# Altium PCB Core.PcbDoc
Units mm, origin at the board's own origin, x right, y up, seen from the top; angles counter-clockwise.
Board outline 86 x 54 mm, 2 copper layers (Top Layer, Bottom Layer); 15 components, 43 nets, 120 pads, 4 vias.
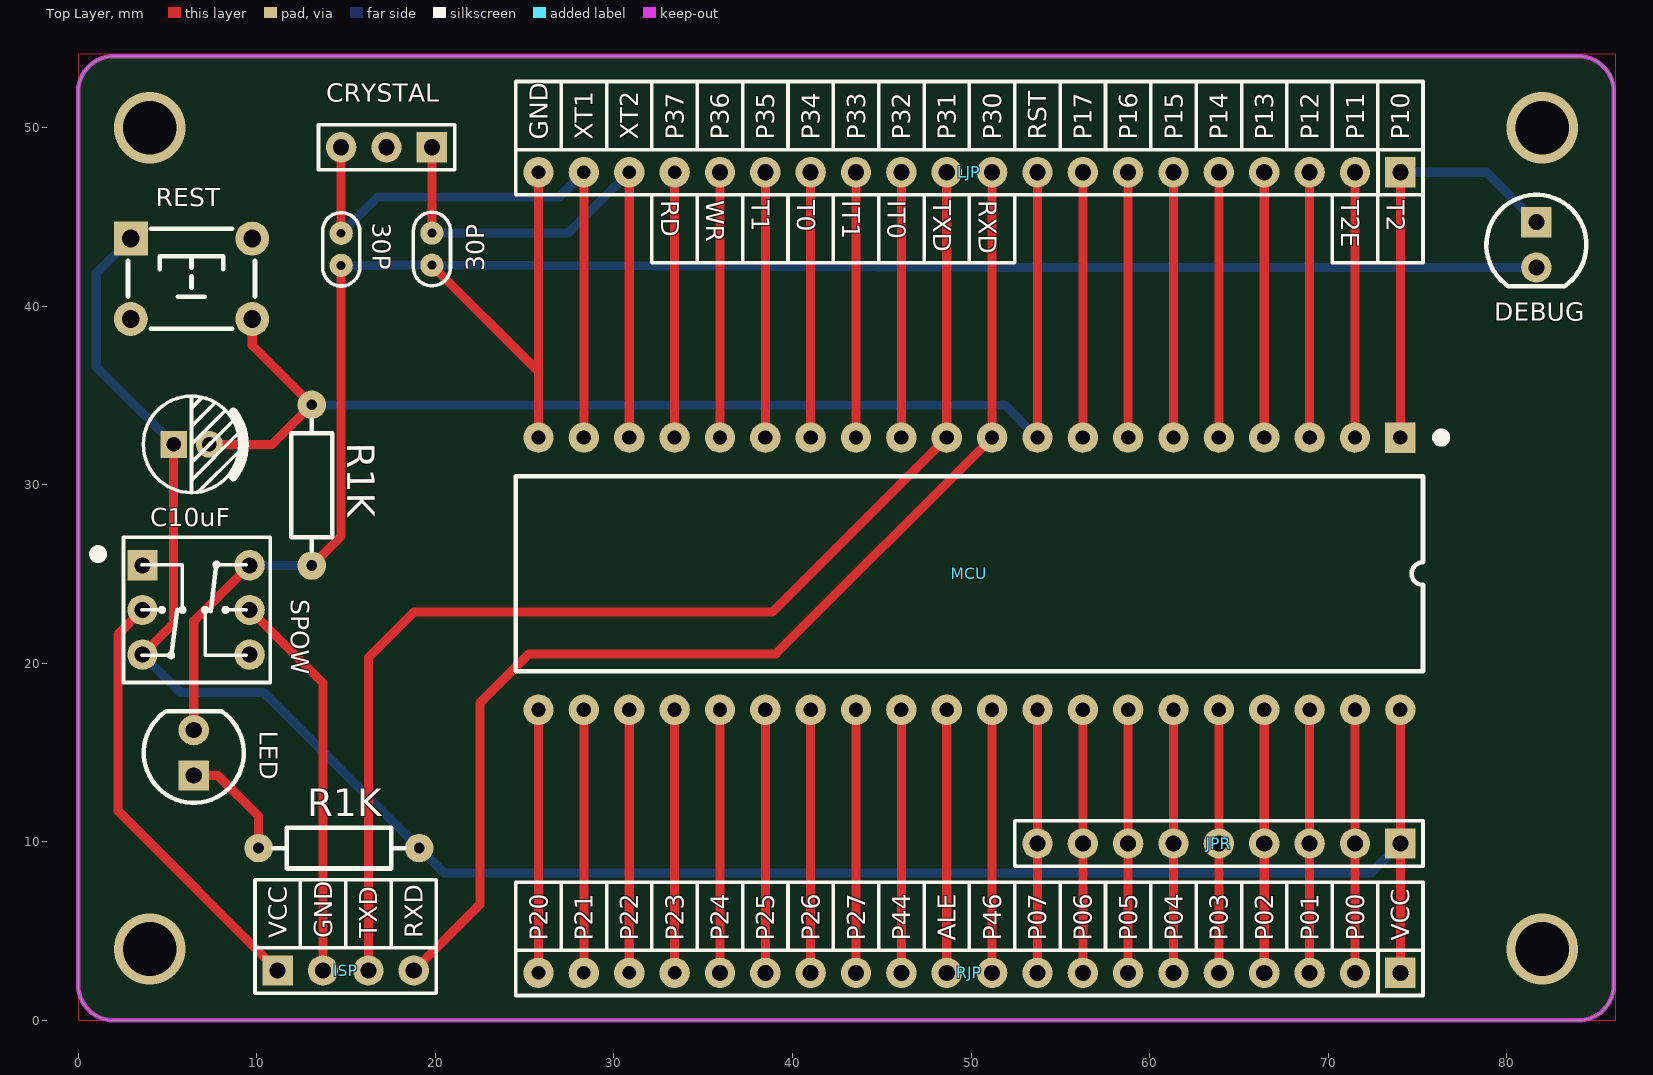
[diagram p0: Top Layer view]
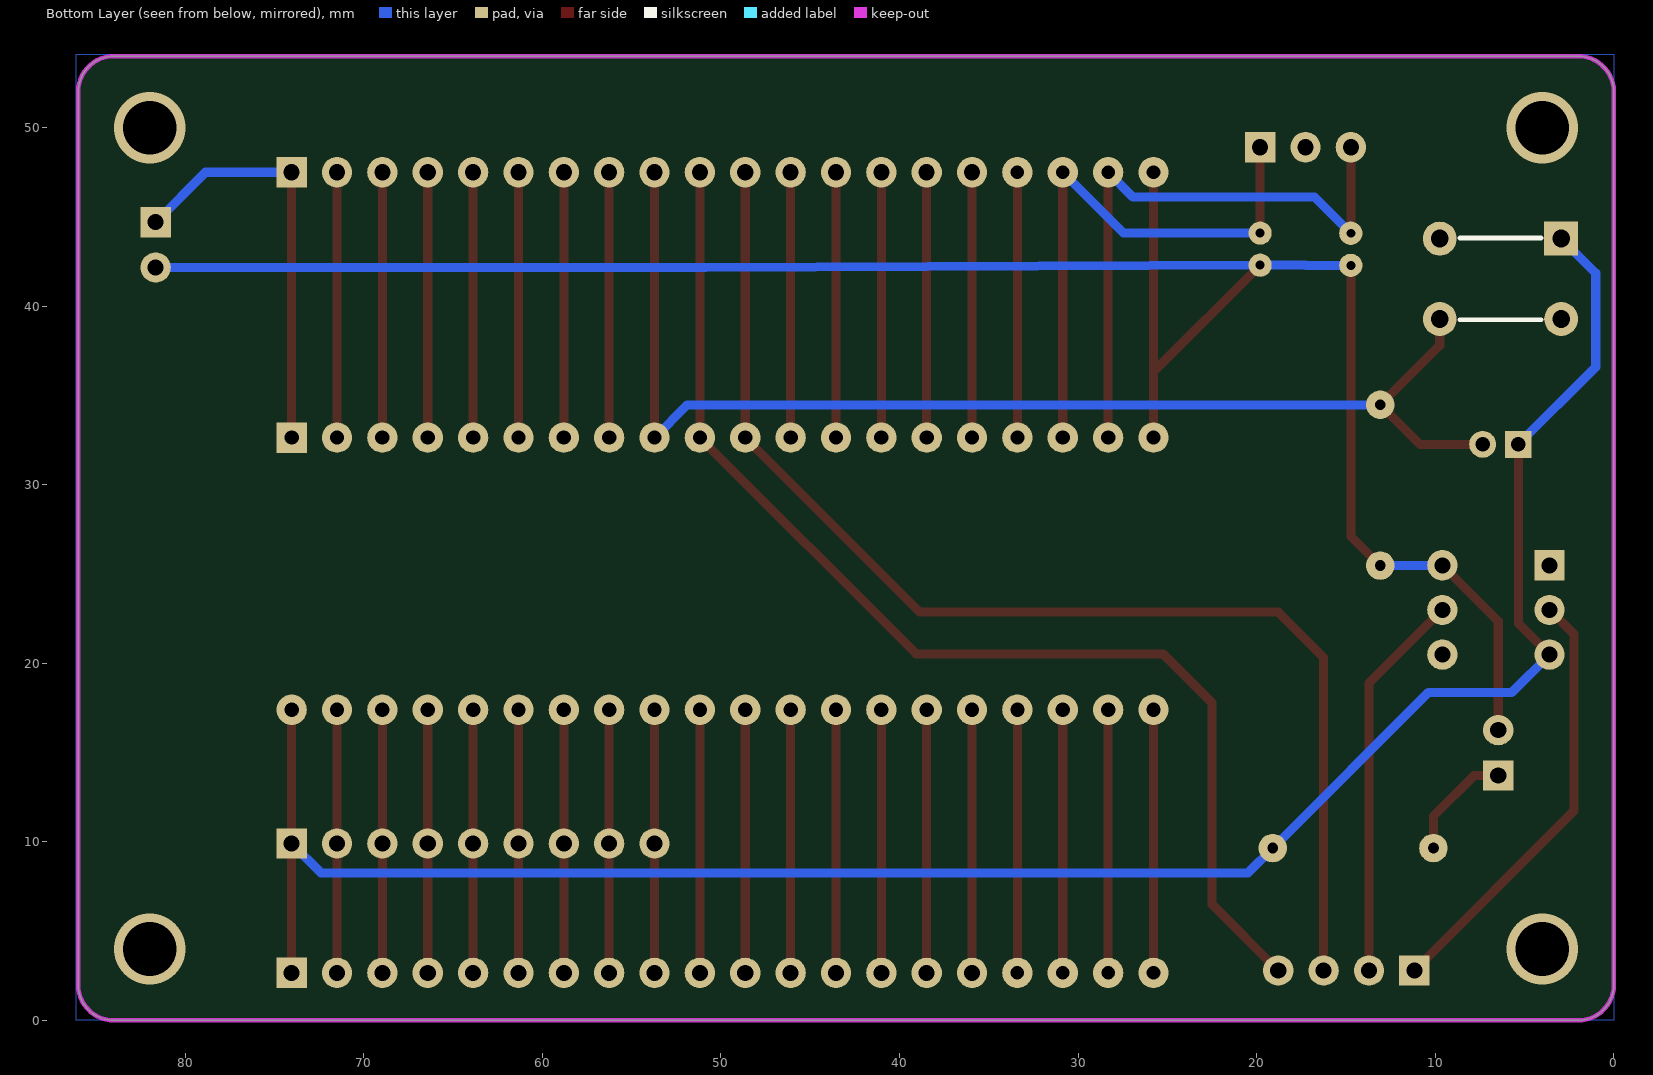
[diagram p1: Bottom Layer view, seen from below]

## Layer stack, top to bottom
Top Solder: solder mask 0.0102, Solder Resist, Dk 3.5
Top Layer: signal copper 0.0356
Dielectric 1: dielectric 0.32, FR-4, Dk 4.8
Bottom Layer: signal copper 0.0356
Bottom Solder: solder mask 0.0102, Solder Resist, Dk 3.5

## Board outline
2,0 cw(c2,2) 0,2 0,52 cw(c2,52) 2,54 84,54 cw(c84,52) 86,52 86,2 cw(c84,2) 84,0

## Design rules (kind name [scope] priority, off if disabled: settings)
AssemblyTestPointUsage [All] p0: scope1count=1 scope1_0_kind=Board scope1_0_value=Board scope2count=1 scope2_0_kind=Board scope2_0_value=Board commentlength=0
AssemblyTestpoint [All] p0: scope1count=1 scope1_0_kind=Board scope1_0_value=Board scope2count=1 scope2_0_kind=Board scope2_0_value=Board commentlength=0
Clearance [All] p0: scope1count=1 scope1_0_kind=Board scope1_0_value=Board scope2count=1 scope2_0_kind=Board scope2_0_value=Board commentlength=0 gap=0.254
Clearance [All] p1: gap=0.254 ignorepadtopadclearanceinfootprint=FALSE except(0: Arc-Hole Track-Hole SMDPad-Hole THPad-Hole Via-Hole Fill-Hole Poly-Hole Region-Hole Text-Hole)
ComponentClearance [All] p0: scope1count=1 scope1_0_kind=Board scope1_0_value=Board scope2count=1 scope2_0_kind=Board scope2_0_value=Board commentlength=0 gap=0.254 collisioncheckmode=3
DiffPairsRouting [All] p0: scope1count=1 scope1_0_kind=Board scope1_0_value=Board scope2count=1 scope2_0_kind=Board scope2_0_value=Board commentlength=0
FabricationTestPointUsage [All] p0: scope1count=1 scope1_0_kind=Board scope1_0_value=Board scope2count=1 scope2_0_kind=Board scope2_0_value=Board commentlength=0 valid=0 allowmultiple=FALSE
FabricationTestpoint [All] p0: scope1count=1 scope1_0_kind=Board scope1_0_value=Board scope2count=1 scope2_0_kind=Board scope2_0_value=Board commentlength=0 side=3 testpointundercomponent=TRUE minsize=1.016 maxsize=2.54 preferedsize=1.524 minholesize=0 maxholesize=1.016 preferedholesize=0.813 testpointgrid=0.025
FanoutControl Fanout_BGA [All] p0 off: scope1count=1 scope1_0_kind=Board scope1_0_value=Board scope2count=1 scope2_0_kind=Board scope2_0_value=Board commentlength=69 // Protel DXP Scope 1 Expression Was: IsBGA   Fanout_BGA (Default Rule)
FanoutControl Fanout_LCC [All] p0 off: scope1count=1 scope1_0_kind=Board scope1_0_value=Board scope2count=1 scope2_0_kind=Board scope2_0_value=Board commentlength=69 // Protel DXP Scope 1 Expression Was: IsLCC   Fanout_LCC (Default Rule)
FanoutControl Fanout_SOIC [All] p0 off: scope1count=1 scope1_0_kind=Board scope1_0_value=Board scope2count=1 scope2_0_kind=Board scope2_0_value=Board commentlength=71 // Protel DXP Scope 1 Expression Was: IsSOIC   Fanout_SOIC (Default Rule)
FanoutControl Fanout_Small [All] p0 off: scope1count=1 scope1_0_kind=Board scope1_0_value=Board scope2count=1 scope2_0_kind=Board scope2_0_value=Board commentlength=84 // Protel DXP Scope 1 Expression Was: (CompPinCount < 5)   Fanout_Small (Default Rule)
FanoutControl Fanout_Default [All] p0: scope1count=1 scope1_0_kind=Board scope1_0_value=Board scope2count=1 scope2_0_kind=Board scope2_0_value=Board commentlength=30 // Fanout_Default (Default Rule)
Height [All] p0: scope1count=1 scope1_0_kind=Board scope1_0_value=Board scope2count=1 scope2_0_kind=Board scope2_0_value=Board commentlength=0
HoleSize [All] p0: scope1count=1 scope1_0_kind=Board scope1_0_value=Board scope2count=1 scope2_0_kind=Board scope2_0_value=Board commentlength=0 absolutevalues=TRUE maxlimit=2.54 minlimit=0.025 maxpercent=80.000 minpercent=20.000
HoleToHoleClearance [All] p0: scope1count=1 scope1_0_kind=Board scope1_0_value=Board scope2count=1 scope2_0_kind=Board scope2_0_value=Board commentlength=0
LayerPairs [All] p0: scope1count=1 scope1_0_kind=Board scope1_0_value=Board scope2count=1 scope2_0_kind=Board scope2_0_value=Board commentlength=0 enforce=TRUE
MinimumSolderMaskSliver [All] p0: scope1count=1 scope1_0_kind=Board scope1_0_value=Board scope2count=1 scope2_0_kind=Board scope2_0_value=Board commentlength=0
NetAntennae [All] p0: scope1count=1 scope1_0_kind=Board scope1_0_value=Board scope2count=1 scope2_0_kind=Board scope2_0_value=Board commentlength=0
PasteMaskExpansion [All] p0: scope1count=1 scope1_0_kind=Board scope1_0_value=Board scope2count=1 scope2_0_kind=Board scope2_0_value=Board commentlength=0 expansion=0
PlaneClearance [All] p0: scope1count=1 scope1_0_kind=Board scope1_0_value=Board scope2count=1 scope2_0_kind=Board scope2_0_value=Board commentlength=0 clearance=0.508
PlaneConnect [All] p0: scope1count=1 scope1_0_kind=Board scope1_0_value=Board scope2count=1 scope2_0_kind=Board scope2_0_value=Board commentlength=0 planeconnectstyle=Relief reliefexpansion=0.508 reliefentries=4 reliefconductorwidth=0.254 reliefairgap=0.254
PolygonConnect [All] p0: scope1count=1 scope1_0_kind=Board scope1_0_value=Board scope2count=1 scope2_0_kind=Board scope2_0_value=Board commentlength=0 connectstyle=Relief reliefconductorwidth=0.254 reliefentries=4 polygonreliefangle="90 Angle"
PolygonConnect [All] p1: connectstyle=Relief reliefconductorwidth=0.254 reliefentries=4 polygonreliefangle="90 Angle" airgapwidth=0.254
RoomDefinition Core-ascii [All] p0: scope1count=1 scope1_0_kind=ComponentClass scope1_0_value=Core-ascii scope2count=1 scope2_0_kind=Board scope2_0_value=Board commentlength=0 region_x1=0 region_y1=0 region_x2=33900000 region_y2=21300000 confinementstyle=ConfineIn
RoomDefinition Core-ascii [InComponentClass('Core-ascii')] p1: confinementstyle=ConfineIn formatcopy=TRUE lockcomponents=FALSE outline 0,0 86.106,0 86.106,54.102 0,54.102
RoutingCorners [All] p0: scope1count=1 scope1_0_kind=Board scope1_0_value=Board scope2count=1 scope2_0_kind=Board scope2_0_value=Board commentlength=0 cornerstyle=45-Degree minsetback=2.54 maxsetback=2.54
RoutingLayers [All] p0: scope1count=1 scope1_0_kind=Board scope1_0_value=Board scope2count=1 scope2_0_kind=Board scope2_0_value=Board commentlength=0 top layer=Automatic bottom layer=Automatic
RoutingPriority [All] p0: scope1count=1 scope1_0_kind=Board scope1_0_value=Board scope2count=1 scope2_0_kind=Board scope2_0_value=Board commentlength=0
RoutingTopology [All] p0: scope1count=1 scope1_0_kind=Board scope1_0_value=Board scope2count=1 scope2_0_kind=Board scope2_0_value=Board commentlength=0 topology=Shortest
RoutingVias [All] p0: scope1count=1 scope1_0_kind=Board scope1_0_value=Board scope2count=1 scope2_0_kind=Board scope2_0_value=Board commentlength=0 holewidth=0.711 width=1.27 viastyle="Through Hole" minholewidth=0.711 minwidth=1.27 maxholewidth=0.711 maxwidth=1.27
RoutingVias [All] p1: holewidth=0.711 width=1.27 viastyle="Through Hole" minholewidth=0.711 minwidth=1.27 maxholewidth=0.711 maxwidth=1.27
ShortCircuit [All] p0: scope1count=1 scope1_0_kind=Board scope1_0_value=Board scope2count=1 scope2_0_kind=Board scope2_0_value=Board commentlength=0 allowed=FALSE
SilkToBoardRegionClearance [All] p0: scope1count=1 scope1_0_kind=Board scope1_0_value=Board scope2count=1 scope2_0_kind=Board scope2_0_value=Board commentlength=0
SilkToSilkClearance [All] p0: scope1count=1 scope1_0_kind=Board scope1_0_value=Board scope2count=1 scope2_0_kind=Board scope2_0_value=Board commentlength=0
SilkToSolderMaskClearance [All] p0 off: scope1count=1 scope1_0_kind=Board scope1_0_value=Board scope2count=1 scope2_0_kind=Board scope2_0_value=Board commentlength=44 // Protel DXP Scope 1 Expression Was: IsPad
SolderMaskExpansion [All] p0: scope1count=1 scope1_0_kind=Board scope1_0_value=Board scope2count=1 scope2_0_kind=Board scope2_0_value=Board commentlength=0 expansion=0.102
SolderMaskExpansion [All] p1: expansion=0.102 istentingtop=FALSE
UnRoutedNet [All] p0: scope1count=1 scope1_0_kind=Board scope1_0_value=Board scope2count=1 scope2_0_kind=Board scope2_0_value=Board commentlength=0
UnpouredPolygon [All] p0: scope1count=1 scope1_0_kind=Board scope1_0_value=Board scope2count=1 scope2_0_kind=Board scope2_0_value=Board commentlength=0
Width [All] p0: scope1count=1 scope1_0_kind=Board scope1_0_value=Board scope2count=1 scope2_0_kind=Board scope2_0_value=Board commentlength=0 maxlimit=0.508 minlimit=0.508 preferedwidth=0.508
Width [All] p1: maxlimit=0.508 minlimit=0.508 preferedwidth=0.508 minimp=50.000000 maximp=50.000000 favimp=50.000000
30 further rules are at their usual default settings.

## Classes and differential pairs
component class Core-ascii: 30P C10uF CRYSTAL DEBUG ISP JPR LED LJP MCU R1K REST RJP SPOW

## Components (designator, comment, footprint, x,y, rotation, side; value= is the part's Value field where it differs from the comment)
30P "30p" "CC 1.8*3.6" 19.812,43.191 r90 top (schematic designator C230P)
30P "30p" "CC 1.8*3.6" 14.732,43.18 r90 top (schematic designator C130P)
C10uF "10UF/25V" "CAP 2.0*5*11" 6.35,32.258 r0 top
CRYSTAL "HDR-1X3" HDR-1X3_Y 19.812,48.895 r180 top
DEBUG "红色" "LED 5MM-R" 81.661,43.434 r270 top
ISP "HDR-1X4" HDR-1X4-ISP 11.176,2.794 r0 top
JPR "HDR-1X9" HDR-1X9_Y 74.041,9.906 r180 top
LED "红色" "LED 5MM-R" 6.477,14.986 r90 top
LJP "HDR-1X20_TEXT" HDR-1X20_TEXT 74.041,47.498 r180 top
MCU "STC89C516RD+" DIP40-600 49.911,25.019 r270 top
R1K "1K" "RS 1/4W" 14.605,9.652 r0 top
R1K "1K" "RS 1/4W" 13.081,29.972 r90 top
REST "6x6x5" "TSW DIP-6*6*4.3" 6.35,41.529 r0 top
RJP "HDR-1X20_TEXTR" HDR-1X20_TEXTR 74.041,2.667 r180 top
SPOW "KET 8X8" "KFT DIP-8X8" 6.604,22.987 r0 top

## Footprints (in the part's own frame and the unit in brackets; to place one, negate y for a bottom-side part, rotate by r counter-clockwise, add the part's x,y. Pads: shape width x height; smd on the part's side, far side on the other; paste and mask are expansions set on the pad)
"CAP 2.0*5*11" [mm] "脚距2mm直径5mm高度11mm"
  rect 1.5x1.5 hole 0.8: 1(-1,0)
  round 1.5 hole 0.8: 2(1,0)
  silkscreen extent -2.7,-2.7 2.96,2.7
"CC 1.8*3.6" [mm] "脚距1.8mm直径3.6mm"
  round 1.3 hole 0.5: 1(-0.9,0) 2(0.9,0)
  silkscreen extent -2.05,-1.04 2.05,1.04
DIP40-600 [mm] "52*15.2*4mm(长宽高)"
  rect 1.7x1.7 hole 0.8: 1(-7.62,24.13)
  round 1.7 hole 0.8: 2(-7.62,21.59) 3(-7.62,19.05) 4(-7.62,16.51) 5(-7.62,13.97) 6(-7.62,11.43) 7(-7.62,8.89) 8(-7.62,6.35) 9(-7.62,3.81) 10(-7.62,1.27) 11(-7.62,-1.27) 12(-7.62,-3.81) 13(-7.62,-6.35) 14(-7.62,-8.89) 15(-7.62,-11.43) 16(-7.62,-13.97) 17(-7.62,-16.51) 18(-7.62,-19.05) 19(-7.62,-21.59) 20(-7.62,-24.13) 21(7.62,-24.13) 22(7.62,-21.59) 23(7.62,-19.05) 24(7.62,-16.51) 25(7.62,-13.97) 26(7.62,-11.43) 27(7.62,-8.89) 28(7.62,-6.35) 29(7.62,-3.81) 30(7.62,-1.27) 31(7.62,1.27) 32(7.62,3.81) 33(7.62,6.35) 34(7.62,8.89) 35(7.62,11.43) 36(7.62,13.97) 37(7.62,16.51) 38(7.62,19.05) 39(7.62,21.59) 40(7.62,24.13)
  silkscreen extent -7.87,-25.4 5.46,26.67
HDR-1X3_Y [mm] "圆孔排母，3脚"
  rect 1.7x1.7 hole 0.9: 1(0,0)
  round 1.7 hole 0.9: 2(2.54,0) 3(5.08,0)
  silkscreen extent -1.27,-1.27 6.35,1.27
HDR-1X4-ISP [mm] "排针，4脚，ISP"
  rect 1.7x1.7 hole 0.9: 1(0,0)
  round 1.7 hole 0.9: 2(2.54,0) 3(5.08,0) 4(7.62,0)
  silkscreen extent -1.27,-1.27 8.89,5.08
HDR-1X9_Y [mm] "圆孔排母，9脚"
  rect 1.7x1.7 hole 0.9: 1(0,0)
  round 1.7 hole 0.9: 2(2.54,0) 3(5.08,0) 4(7.62,0) 5(10.16,0) 6(12.7,0) 7(15.24,0) 8(17.78,0) 9(20.32,0)
  silkscreen extent -1.27,-1.27 21.59,1.27
HDR-1X20_TEXT [mm] "排针，20脚，带标注"
  rect 1.7x1.7 hole 0.9: 1(0,0)
  round 1.7 hole 0.9: 2(2.54,0) 3(5.08,0) 4(7.62,0) 5(10.16,0) 6(12.7,0) 7(15.24,0) 8(17.78,0) 9(20.32,0) 10(22.86,0) 11(25.4,0) 12(27.94,0) 13(30.48,0) 14(33.02,0) 15(35.56,0) 16(38.1,0)
  round 1.7 hole 0.762: 17(40.64,0) 18(43.18,0) 19(45.72,0) 20(48.26,0)
  silkscreen extent -1.27,-5.08 49.53,5.08
HDR-1X20_TEXTR [mm] "排针，20脚，带标注"
  rect 1.7x1.7 hole 0.9: 1(0,0)
  round 1.7 hole 0.9: 2(2.54,0) 3(5.08,0) 4(7.62,0) 5(10.16,0) 6(12.7,0) 7(15.24,0) 8(17.78,0) 9(20.32,0) 10(22.86,0) 11(25.4,0) 12(27.94,0) 13(30.48,0) 14(33.02,0) 15(35.56,0) 16(38.1,0)
  round 1.7 hole 0.762: 17(40.64,0) 18(43.18,0) 19(45.72,0) 20(48.26,0)
  silkscreen extent -1.27,-5.08 49.53,1.27
"KFT DIP-8X8" [mm] "自锁开关，规格：8*8mm"
  rect 1.7x1.7 hole 0.9: 1(-3,2.5)
  round 1.7 hole 0.9: 2(-3,0) 3(-3,-2.5) 4(3,-2.5) 5(3,0) 6(3,2.5)
  silkscreen extent -5.69,-4.06 4.15,4.06
"LED 5MM-R" [mm] "红色5mm直插LED"
  rect 1.7x1.7 hole 0.9: 1(-1.27,0)
  round 1.7 hole 0.9: 2(1.27,0)
  silkscreen extent -2.8,-2.8 2.33,2.8
"RS 1/4W" [mm] "直插色环电阻，脚距9mm，直径2.3mm"
  round 1.6 hole 0.6: 1(-4.5,0) 2(4.5,0)
  silkscreen extent -3.68,-1.14 3.68,1.14
"TSW DIP-6*6*4.3" [mm] "6*6*4.3mm"
  rect 1.9x1.9 hole 1: 1(-3.4,2.25)
  round 1.9 hole 1: 2(-3.4,-2.25) 3(3.4,-2.25) 4(3.4,2.25)
  silkscreen extent -3.56,-2.79 3.56,2.79

## Part data
30P 30P: library part C-CC, "直插瓷片电容"
C10uF: library part C-CAP, "直插电解电容"
CRYSTAL: library part "Header 3", "3P接插件"
DEBUG LED: library part LED-5MM, "5mm插件LED"
ISP: library part "Header 4", "4P接插件"
JPR: library part "Header 9", "9P接插件"
LJP RJP: library part "Header 20_TEXT", "20P接插件"
MCU: "STC单片机"
R1K R1K: library part R-CRR, "直插色环电阻"
REST: library part "TSW DIP-6x6", "直插6x6轻触开关"
SPOW: "8*8自锁开关"

## Via types
v1: diameter 4, hole 3, Top Layer to Bottom Layer, 4 vias

## Nets (pads, with @x,y where several pads share a name; then routed paths per layer and width w, separated by ;. In a path a pad name is that pad's centre, name@x,y a point inside that pad or via, vN(x,y) a via of type N, cw(c..) or ccw(c..) an arc to the next point about the centre after c; other vN are vias at no path point)
LNET1: DEBUG.1 LJP.1 MCU.1 | length 23.6
  Top Layer w0.508: MCU.1 LJP.1
  Bottom Layer w0.508: LJP.1 78.867,47.498 DEBUG.1
LNET2: LJP.2 MCU.2 | length 14.9
  Top Layer w0.508: MCU.2 LJP.2
LNET3: LJP.3 MCU.3 | length 14.9
  Top Layer w0.508: MCU.3 LJP.3
LNET4: LJP.4 MCU.4 | length 14.9
  Top Layer w0.508: MCU.4 LJP.4
LNET5: LJP.5 MCU.5 | length 14.9
  Top Layer w0.508: MCU.5 LJP.5
LNET6: LJP.6 MCU.6 | length 14.9
  Top Layer w0.508: MCU.6 LJP.6
LNET7: LJP.7 MCU.7 | length 14.9
  Top Layer w0.508: MCU.7 LJP.7
LNET8: LJP.8 MCU.8 | length 14.9
  Top Layer w0.508: MCU.8 LJP.8
LNET9: C10uF.2 LJP.9 MCU.9 R1K.2@13.081,34.472 REST.3 | length 69.1
  Top Layer w0.508: C10uF.2 10.867,32.258 13.081,34.472 9.75,37.803 REST.3 ; MCU.9 LJP.9
  Bottom Layer w0.508: R1K.2@13.081,34.472 51.888,34.472 MCU.9
LNET10: ISP.4 LJP.10 MCU.10 | length 66.2
  Top Layer w0.508: ISP.4 22.504,6.502 22.504,17.78 25.248,20.523 39.065,20.523 MCU.10 LJP.10
LNET11: ISP.3 LJP.11 MCU.11 | length 69.9
  Top Layer w0.508: ISP.3 16.256,20.32 18.796,22.86 38.862,22.86 MCU.11 LJP.11
LNET12: LJP.12 MCU.12 | length 14.9
  Top Layer w0.508: MCU.12 LJP.12
LNET13: LJP.13 MCU.13 | length 14.9
  Top Layer w0.508: MCU.13 LJP.13
LNET14: LJP.14 MCU.14 | length 14.9
  Top Layer w0.508: MCU.14 LJP.14
LNET15: LJP.15 MCU.15 | length 14.9
  Top Layer w0.508: MCU.15 LJP.15
LNET16: LJP.16 MCU.16 | length 14.9
  Top Layer w0.508: MCU.16 LJP.16
LNET17: LJP.17 MCU.17 | length 14.9
  Top Layer w0.508: MCU.17 LJP.17
LNET18: 30P.2@19.812,44.091 CRYSTAL.1 LJP.18 MCU.18 | length 32.1
  Top Layer w0.508: 30P.2@19.812,44.091 CRYSTAL.1 ; MCU.18 LJP.18
  Bottom Layer w0.508: 30P.2@19.812,44.091 27.454,44.091 LJP.18
LNET19: 30P.2@14.732,44.08 CRYSTAL.3 LJP.19 MCU.19 | length 34.7
  Top Layer w0.508: 30P.2@14.732,44.08 CRYSTAL.3 ; MCU.19 LJP.19
  Bottom Layer w0.508: 30P.2@14.732,44.08 16.756,46.104 26.927,46.104 LJP.19
LNET20: 30P.1 DEBUG.2 LED.2 LJP.20 MCU.20 R1K.1@13.081,25.472 SPOW.6 | length 121.7
  Top Layer w0.508: LED.2 6.477,22.36 SPOW.6 ; R1K.1@13.081,25.472 14.732,27.123 30P.1@14.732,42.28 ; 30P.1@19.812,42.291 25.781,36.322 ; MCU.20 25.781,36.322 ; LJP.20 25.781,36.322
  Bottom Layer w0.508: SPOW.6 11.328,25.487 11.343,25.472 R1K.1@13.081,25.472 ; 30P.1@14.732,42.28 17.247,42.28 17.258,42.291 19.812,42.291 50.876,42.164 DEBUG.2
NetISP_1: ISP.1 SPOW.2 | length 24.5
  Top Layer w0.508: SPOW.2 2.235,21.618 2.235,11.735 ISP.1
NetISP_2: ISP.2 SPOW.5 | length 21.9
  Top Layer w0.508: SPOW.5 13.716,18.875 ISP.2
NetLED_1: LED.1 R1K.1@10.105,9.652 | length 6.4
  Top Layer w0.508: LED.1 7.819,13.716 10.105,11.43 R1K.1@10.105,9.652
RNET1: C10uF.1 JPR.1 MCU.40 R1K.2@19.105,9.652 REST.1 RJP.1 SPOW.3 | length 117.5
  Top Layer w0.508: SPOW.3 5.35,22.233 C10uF.1 ; RJP.1 JPR.1 MCU.40
  Bottom Layer w0.508: REST.1 1.016,41.845 1.016,36.592 C10uF.1 ; SPOW.3 5.727,18.364 10.393,18.364 19.105,9.652 20.502,8.255 72.39,8.255 JPR.1
RNET2: JPR.2 MCU.39 RJP.2 | length 14.7
  Top Layer w0.508: RJP.2 JPR.2 MCU.39
RNET3: JPR.3 MCU.38 RJP.3 | length 14.7
  Top Layer w0.508: RJP.3 JPR.3 MCU.38
RNET4: JPR.4 MCU.37 RJP.4 | length 14.7
  Top Layer w0.508: RJP.4 JPR.4 MCU.37
RNET5: JPR.5 MCU.36 RJP.5 | length 14.7
  Top Layer w0.508: RJP.5 JPR.5 MCU.36
RNET6: JPR.6 MCU.35 RJP.6 | length 14.7
  Top Layer w0.508: RJP.6 JPR.6 MCU.35
RNET7: JPR.7 MCU.34 RJP.7 | length 14.7
  Top Layer w0.508: RJP.7 JPR.7 MCU.34
RNET8: JPR.8 MCU.33 RJP.8 | length 14.7
  Top Layer w0.508: RJP.8 JPR.8 MCU.33
RNET9: JPR.9 MCU.32 RJP.9 | length 14.7
  Top Layer w0.508: RJP.9 JPR.9 MCU.32
RNET10: MCU.31 RJP.10 | length 14.7
  Top Layer w0.508: RJP.10 MCU.31
RNET11: MCU.30 RJP.11 | length 14.7
  Top Layer w0.508: RJP.11 MCU.30
RNET12: MCU.29 RJP.12 | length 14.7
  Top Layer w0.508: RJP.12 MCU.29
RNET13: MCU.28 RJP.13 | length 14.7
  Top Layer w0.508: RJP.13 MCU.28
RNET14: MCU.27 RJP.14 | length 14.7
  Top Layer w0.508: RJP.14 MCU.27
RNET15: MCU.26 RJP.15 | length 14.7
  Top Layer w0.508: RJP.15 MCU.26
RNET16: MCU.25 RJP.16 | length 14.7
  Top Layer w0.508: RJP.16 MCU.25
RNET17: MCU.24 RJP.17 | length 14.7
  Top Layer w0.508: RJP.17 MCU.24
RNET18: MCU.23 RJP.18 | length 14.7
  Top Layer w0.508: RJP.18 MCU.23
RNET19: MCU.22 RJP.19 | length 14.7
  Top Layer w0.508: RJP.19 MCU.22
RNET20: MCU.21 RJP.20 | length 14.7
  Top Layer w0.508: RJP.20 MCU.21
pads on no net: CRYSTAL.2 REST.2 REST.4 SPOW.1 SPOW.4
copper on no net:
  other v1: 4,4 82,4 4,50 82,50

## Polygon pours and split planes (outlines as drawn)
no net on Top Layer "NONET_L-01_P-001" (solid, pour order 0): 0,0 86.106,0 86.106,54.102 0,54.102
no net on Bottom Layer "NONET_L-01_P-001" (solid, pour order 1): 0,0 86.106,0 86.106,54.102 0,54.102

## Keep-outs
Keep-Out Layer:
  the board outline again, w0.254

## Text inside footprints (layer, text, board x,y; h text height)
C10uF: Mechanical 13 "SMARTBOT-CORE-V1.0" at 83.439,37.338 h1.52 r90
ISP: Top Overlay "RXD" at 19.302,4.608 h1.02 r90; Top Overlay "TXD" at 16.762,4.608 h1.02 r90; Top Overlay "GND" at 14.222,4.608 h1.02 r90; Top Overlay "VCC" at 11.682,4.608 h1.02 r90
LJP: Top Overlay "RST" at 54.227,49.312 h1.02 r90; Top Overlay "P37" at 33.907,49.312 h1.02 r90; Top Overlay "P36" at 36.447,49.312 h1.02 r90; Top Overlay "P35" at 38.987,49.312 h1.02 r90; Top Overlay "P34" at 41.527,49.312 h1.02 r90; Top Overlay "P33" at 44.067,49.312 h1.02 r90; Top Overlay "P32" at 46.607,49.312 h1.02 r90; Top Overlay "P31" at 49.147,49.312 h1.02 r90; Top Overlay "P30" at 51.687,49.312 h1.02 r90; Top Overlay "P17" at 56.767,49.312 h1.02 r90; Top Overlay "P16" at 59.307,49.312 h1.02 r90; Top Overlay "P15" at 61.847,49.312 h1.02 r90; Top Overlay "P14" at 64.387,49.312 h1.02 r90; Top Overlay "P13" at 66.927,49.312 h1.02 r90; Top Overlay "P12" at 69.467,49.312 h1.02 r90; Top Overlay "P11" at 72.007,49.312 h1.02 r90; Top Overlay "P10" at 74.547,49.312 h1.02 r90; Top Overlay "T2" at 73.281,45.938 h1.02 r270; Top Overlay "T2E" at 70.741,45.938 h1.02 r270; Top Overlay "RXD" at 50.421,45.938 h1.02 r270; Top Overlay "TXD" at 47.881,45.938 h1.02 r270; Top Overlay "IT0" at 45.341,45.938 h1.02 r270; Top Overlay "IT1" at 42.801,45.938 h1.02 r270; Top Overlay "T0" at 40.261,45.938 h1.02 r270; Top Overlay "T1" at 37.721,45.938 h1.02 r270; Top Overlay "WR" at 35.181,45.938 h1.02 r270; Top Overlay "RD" at 32.641,45.938 h1.02 r270; Top Overlay "XT2" at 31.367,49.312 h1.02 r90; Top Overlay "XT1" at 28.827,49.312 h1.02 r90; Top Overlay "GND" at 26.287,49.312 h1.02 r90
RJP: Top Overlay "P01" at 69.467,4.471 h1.02 r90; Top Overlay "P00" at 72.007,4.471 h1.02 r90; Top Overlay "P02" at 66.927,4.471 h1.02 r90; Top Overlay "P03" at 64.387,4.471 h1.02 r90; Top Overlay "P04" at 61.847,4.471 h1.02 r90; Top Overlay "P05" at 59.307,4.471 h1.02 r90; Top Overlay "P06" at 56.767,4.471 h1.02 r90; Top Overlay "P07" at 54.227,4.471 h1.02 r90; Top Overlay "P46" at 51.687,4.471 h1.02 r90; Top Overlay "ALE" at 49.147,4.471 h1.02 r90; Top Overlay "P44" at 46.607,4.471 h1.02 r90; Top Overlay "P27" at 44.067,4.471 h1.02 r90; Top Overlay "P26" at 41.527,4.471 h1.02 r90; Top Overlay "P25" at 38.987,4.471 h1.02 r90; Top Overlay "P24" at 36.447,4.471 h1.02 r90; Top Overlay "P23" at 33.907,4.471 h1.02 r90; Top Overlay "P22" at 31.367,4.471 h1.02 r90; Top Overlay "P21" at 28.827,4.471 h1.02 r90; Top Overlay "VCC" at 74.547,4.471 h1.02 r90; Top Overlay "P20" at 26.287,4.471 h1.02 r90